# Altium PCB DVI.PcbDoc
Units mm, origin at the board's own origin, x right, y up, seen from the top; angles counter-clockwise.
Board outline 36.07 x 17.53 mm, 2 copper layers (Top Layer, Bottom Layer); 20 components, 35 nets, 130 pads, 36 vias.
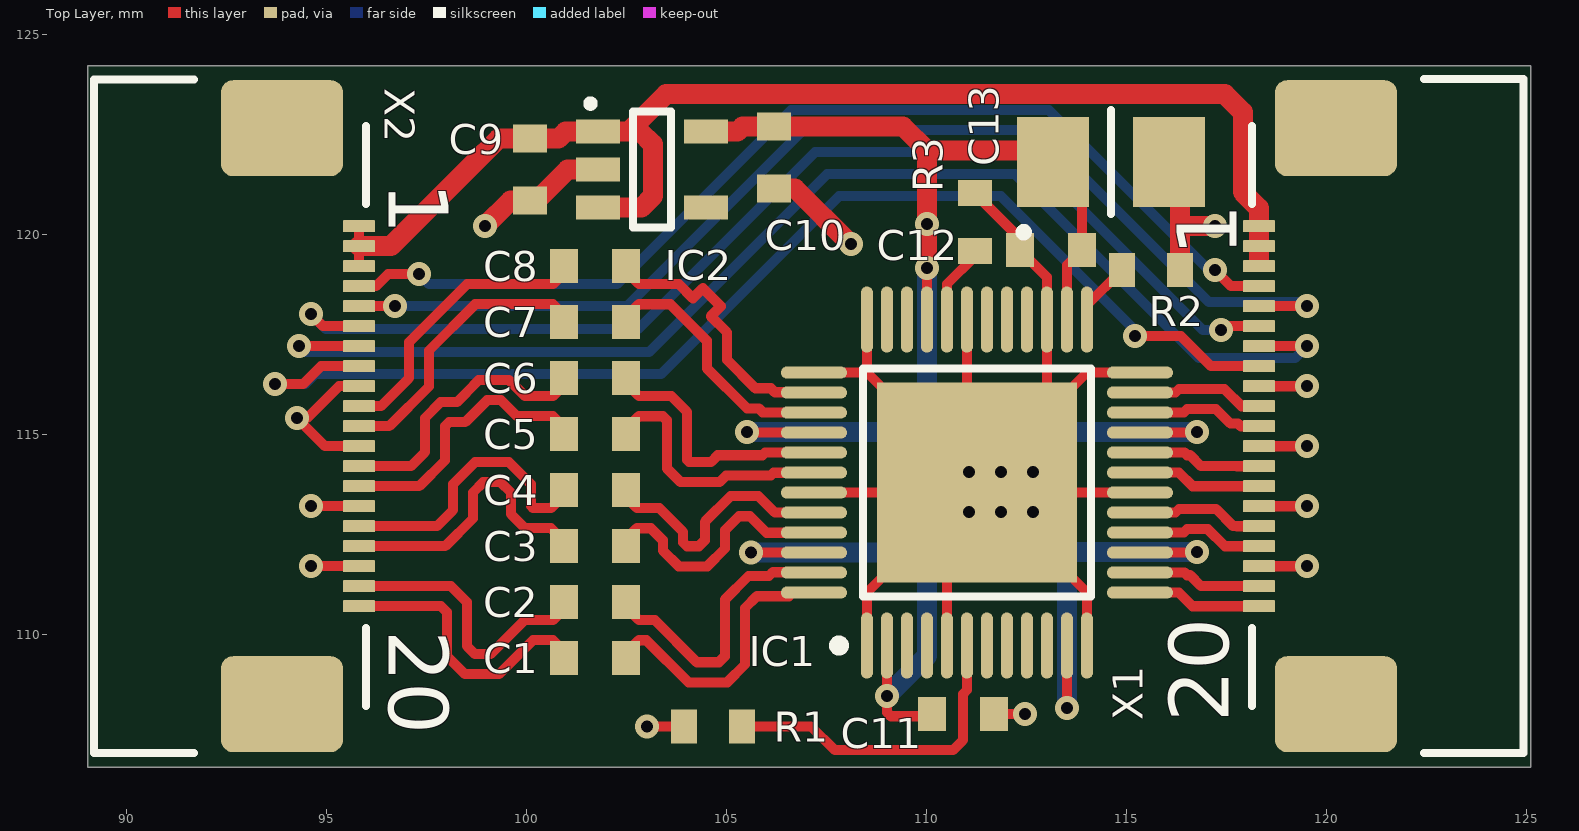
[diagram p0: Top Layer view]
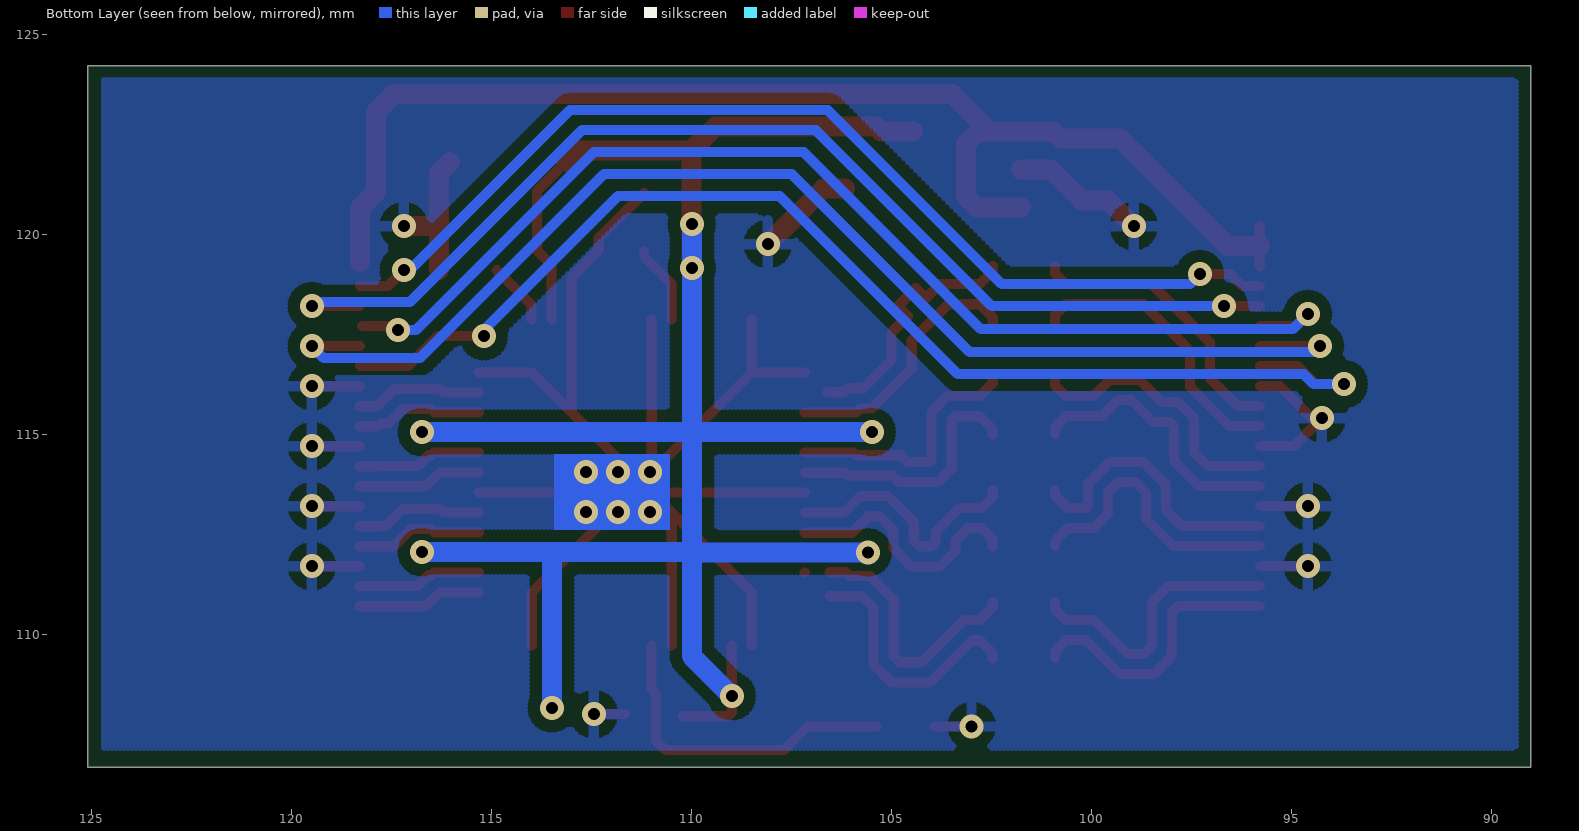
[diagram p1: Bottom Layer view, seen from below]

## Layer stack, top to bottom
Top Solder: solder mask 0.0102, Solder Resist, Dk 3.5
Top Layer: signal copper 0.0356
Dielectric1: dielectric 0.32, FR-4, Dk 4.8
Bottom Layer: signal copper 0.0356
Bottom Solder: solder mask 0.0102, Solder Resist, Dk 3.5

## Board outline
89.027,106.68 89.027,124.206 125.095,124.206 125.095,106.68

## Design rules (kind name [scope] priority, off if disabled: settings)
Clearance GND [InNet('GND') And OnLayer('Bottom Layer')] p1: gap=0.3
Clearance [All] p2: gap=0.15
DiffPairsRouting [All] p1: maxlimit=0.25 minlimit=0.15 mostfreqgap=0.25 toplayer_minwidth=0.381 toplayer_maxwidth=0.381 toplayer_prefwidth=0.381 bottomlayer_minwidth=0.381 bottomlayer_maxwidth=0.381 bottomlayer_prefwidth=0.381 maxuncoupledlength=12.7
FabricationTestPointUsage TestPointUsage [All] p1: valid=0 allowmultiple=FALSE
FabricationTestpoint Testpoint [All] p1: side=3 testpointundercomponent=TRUE minsize=1.016 maxsize=2.54 preferedsize=1.524 minholesize=0 maxholesize=1.016 preferedholesize=0.813 testpointgrid=0.025 allowsidetop=TRUE allowsidebottom=TRUE usegrid=TRUE gridtolerance=0
HoleSize [All] p1: absolutevalues=TRUE maxlimit=3 minlimit=0.3 maxpercent=80.000 minpercent=20.000
MinimumSolderMaskSliver [All] p1: minsoldermaskwidth=0
PolygonConnect [All] p1: connectstyle=Relief reliefconductorwidth=0.254 reliefentries=4 polygonreliefangle="90 Angle" airgapwidth=0.254
RoutingVias [All] p1: holewidth=0.711 width=1.27 viastyle="Through Hole" minholewidth=0.711 minwidth=1.27 maxholewidth=0.711 maxwidth=1.27
SilkToSolderMaskClearance SilkscreenOverComponentPads [IsPad] p1: minsilkscreentomaskgap=0 clearancetoexposedcopper=TRUE
SolderMaskExpansion [All] p1: expansion=0
Width [All] p1: maxlimit=0.5 minlimit=0.15 preferedwidth=0.25 minimp=50.000000 maximp=50.000000 favimp=50.000000
24 further rules are at their usual default settings.

## Classes and differential pairs
differential pair DDIC: +DDIC_P -DDIC_N
differential pair DDI2: +DDI2_P -DDI2_N
differential pair DDI1: +DDI1_P -DDI1_N
differential pair DDI0: +DDI0_P -DDI0_N
differential pair D2: +D2_P -D2_N
differential pair D2_OUT: +D2_OUT_P -D2_OUT_N
differential pair D1: +D1_P -D1_N
differential pair D1_OUT: +D1_OUT_P -D1_OUT_N
differential pair D0: +D0_P -D0_N
differential pair D0_OUT: +D0_OUT_P -D0_OUT_N
differential pair CLK: +CLK_P -CLK_N
differential pair CLK_OUT: +CLK_OUT_P -CLK_OUT_N

## Components (designator, comment, footprint, x,y, rotation, side; value= is the part's Value field where it differs from the comment)
C1 "100nF" T_CAPC0603X33N 101.7,109.4 r0 top locked
C2 "100nF" T_CAPC0603X33N 101.7,110.8 r0 top locked
C3 "100nF" T_CAPC0603X33N 101.7,112.2 r0 top locked
C4 "100nF" T_CAPC0603X33N 101.7,113.6 r0 top locked
C5 "100nF" T_CAPC0603X33N 101.7,115 r0 top locked
C6 "100nF" T_CAPC0603X33N 101.7,116.4 r0 top locked
C7 "100nF" T_CAPC0603X33N 101.7,117.8 r0 top locked
C8 "100nF" T_CAPC0603X33N 101.7,119.2 r0 top locked
C9 "1uF" T_CAPC0603X33N 100.076,121.62 r90 top locked
C10 "1uF" T_CAPC0603X33N 106.172,121.92 r90 top locked
C11 "100nF" T_CAPC0603X33N 110.9,108 r180 top locked
C12 "100nF" T_CAPC0603X33N 113.1,119.6 r0 top
C13 "22uF" CAPMP3528X210N 114.6,121.8 r0 top
IC1 "IC-NXP-PTN3360B" TSQFP50P900X900X160-48N_TP 111.252,113.792 r90 top locked
IC2 "NCP511SN33T1G" SOT95P279X142-5N 103.124,121.62 r0 top locked
R1 "10K" T_RESC0603X30N 104.648,107.696 r180 top locked
R2 "0R" T_RESC0603X30N 115.6,119.1 r180 top
R3 "0R" T_RESC0603X30N 111.2,120.3 r270 top locked
X1 "52745-2097" T_MOLEX_52745-2097_MIRROR 118.3,110.7 r90 top locked
X2 "52745-2097" T_MOLEX_52745-2097 95.8,120.2 r270 top locked

## Footprints (in the part's own frame and the unit in brackets; to place one, negate y for a bottom-side part, rotate by r counter-clockwise, add the part's x,y. Pads: shape width x height; smd on the part's side, far side on the other; paste and mask are expansions set on the pad)
CAPMP3528X210N [mm]
  rect 1.8x2.25 smd: 1(-1.45,0) 2(1.45,0)
  silkscreen extent -2.26,-1.83 0,1.3, body extent -1.85,-1.5 1.85,1.5, height 1.9
SOT95P279X142-5N [mm]
  rect 1.1x0.6 smd: 1(-1.35,0.95) 2(-1.35,0) 3(-1.35,-0.95) 4(1.35,-0.95) 5(1.35,0.95)
  silkscreen extent -1.61,-1.45 0.48,1.73, body extent -0.9,-1.52 0.9,1.52, height 1.1
T_CAPC0603X33N [mm]
  rect 0.7x0.85 smd: 1(-0.775,0) 2(0.775,0)
  body extent -0.8,-0.4 0.8,0.4, height 0.9
T_MOLEX_52745-2097 [mm] "DVI FFC Connector 0.5mm pitch"
  rrect12% 0.3x0.8 smd: 1(0,0) 2(0.5,0) 3(1,0) 4(1.5,0) 5(2,0) 6(2.5,0) 7(3,0) 8(3.5,0) 9(4,0) 10(4.5,0) 11(5,0) 12(5.5,0) 13(6,0) 14(6.5,0) 15(7,0) 16(7.5,0) 17(8,0) 18(8.5,0) 19(9,0) 20(9.5,0)
  rrect25% 2.4x3.05 smd: ""(-2.45,-1.925) ""(11.95,-1.925)
  silkscreen extent -3.67,-6.62 13.18,0.17, body extent -3.3,-6.05 12.8,0.35, height 2
T_MOLEX_52745-2097_MIRROR [mm] "DVI FFC Connector 0.5mm pitch"
  rrect12% 0.3x0.8 smd: 1(9.5,0) 2(9,0) 3(8.5,0) 4(8,0) 5(7.5,0) 6(7,0) 7(6.5,0) 8(6,0) 9(5.5,0) 10(5,0) 11(4.5,0) 12(4,0) 13(3.5,0) 14(3,0) 15(2.5,0) 16(2,0) 17(1.5,0) 18(1,0) 19(0.5,0) 20(0,0)
  rrect25% 2.4x3.05 smd: ""(-2.45,-1.925) ""(11.95,-1.925)
  silkscreen extent -3.67,-6.62 13.18,0.17, body extent -3.3,-6.05 12.8,0.35, height 2
T_RESC0603X30N [mm]
  rect 0.65x0.85 smd: 1(-0.725,0) 2(0.725,0)
  body extent -0.8,-0.4 0.8,0.4, height 0.5
TSQFP50P900X900X160-48N_TP [mm]
  oval 1.65x0.3 smd: 1(-4.075,2.75) 2(-4.075,2.25) 3(-4.075,1.75) 4(-4.075,1.25) 5(-4.075,0.75) 6(-4.075,0.25) 7(-4.075,-0.25) 8(-4.075,-0.75) 9(-4.075,-1.25) 10(-4.075,-1.75) 11(-4.075,-2.25) 12(-4.075,-2.75) 25(4.075,-2.75) 26(4.075,-2.25) 27(4.075,-1.75) 28(4.075,-1.25) 29(4.075,-0.75) 30(4.075,-0.25) 31(4.075,0.25) 32(4.075,0.75) 33(4.075,1.25) 34(4.075,1.75) 35(4.075,2.25) 36(4.075,2.75)
  oval 0.3x1.65 smd: 13(-2.75,-4.075) 14(-2.25,-4.075) 15(-1.75,-4.075) 16(-1.25,-4.075) 17(-0.75,-4.075) 18(-0.25,-4.075) 19(0.25,-4.075) 20(0.75,-4.075) 21(1.25,-4.075) 22(1.75,-4.075) 23(2.25,-4.075) 24(2.75,-4.075) 37(2.75,4.075) 38(2.25,4.075) 39(1.75,4.075) 40(1.25,4.075) 41(0.75,4.075) 42(0.25,4.075) 43(-0.25,4.075) 44(-0.75,4.075) 45(-1.25,4.075) 46(-1.75,4.075) 47(-2.25,4.075) 48(-2.75,4.075)
  rect 5x5 smd: 49(0,0)
  silkscreen extent -4.2,-2.85 2.85,3.57, body extent -3.5,-3.5 3.5,3.5, height 1.6

## Part data
C1 C2 C3 C4 C5 C6 C7 C8 C11 C12: library part C-X7R-100nF-16V-10%-0402, "Capacitor Ceramic X7R 100nF 16V 10% 0402"
C9 C10: library part C-X5R-1uF-16V-20%-0603, "Capacitor Ceramic X5R 1uF 16V 20% 0603"
C13: library part C-TA-22uF-10V-20%-3528, "Capacitor TA 22uF 10V 20% 3528"
IC2: library part IC-ON-NCP511SN33T1G, "NCP511SN33T1G LDO Regulator"
R1: library part R-10KR-63mW-1%-0603, "Resistor 10 Kohm 63mW 1% 0603"
R2 R3: library part R-0R-63mW-1%-0603, "Resistor 0 ohm 63mW 1% 0603"
X1 X2: library part CON-Molex-52745-2097-20-0.5mm, "0.50mm Pitch FFC/FPC DVI Connector"

## Via types
v1: diameter 0.6, hole 0.3, Top Layer to Bottom Layer, 36 vias

## Nets (pads, with @x,y where several pads share a name; then routed paths per layer and width w, separated by ;. In a path a pad name is that pad's centre, name@x,y a point inside that pad or via, vN(x,y) a via of type N, cw(c..) or ccw(c..) an arc to the next point about the centre after c; other vN are vias at no path point)
3V3: C10.2 C11.2 C12.2 C13.1 IC1.2 IC1.11 IC1.15 IC1.21 IC1.26 IC1.33 IC1.40 IC1.46 IC2.5 | length 66.3
  Top Layer w0.25: v1(110,120.25) v1@110.002,120.25 ; C13.1 113.875,121.075 C12.2 113.502,119.227 IC1.26
  Top Layer w0.254: v1(105.6,112.042) IC1.46 ; v1@105.65,115.042 IC1.40 ; IC1.2 109.002,108.048 109.1,107.95 C11.2@110.223,107.95 ; IC1.33 v1@110.002,119.148 ; v1@113.502,108.152 IC1.11 ; IC1.15 v1@116.742,112.042 ; IC1.21 v1@116.742,115.042
  Top Layer w0.5: IC2.5 105.27,122.57 105.395,122.695 C10.2 109.405,122.695 110.002,122.098 ; v1@110.002,119.15 110.002,120.25 110.002,122.098 ; C13.1 112.852,122.098 110.002,122.098
  Bottom Layer w0.5: v1(105.6,112.042) 109.942,112.042 ; v1@105.65,115.05 109.95,115.05 110,115.1 ; v1(109,108.45) 110,109.45 110,115.1 ; v1(110,120.25) v1(110,119.15) 110,115.1 ; 110.05,112.05 v1(116.75,112.05) ; 110.05,115.05 v1(116.75,115.05) ; v1(113.5,108.15) 113.5,112
  other v1: 105.5,115.05
5V: C9.2 IC2.1 IC2.3 X1.1 X1.2 X1.3 X2.1 X2.2 X2.3 | length 32.3
  Top Layer w0.254: X2.3 X2.2 X2.1
  Top Layer w0.5: X2.2 96.6,119.7 98.65,121.75 99.295,122.395 C9.2 100.795,122.395 100.97,122.57 IC2.1 102.55,122.57 ; IC2.3 102.87,120.67 103.15,120.95 103.15,122.25 102.83,122.57 102.55,122.57 ; X1.3@118.3,119.3 X1.2 X1.1 118.3,120.65 117.9,121.05 117.9,123.05 117.45,123.5 103.48,123.5 102.55,122.57
CEC: X1.7 X2.7 | length 31.8
  Top Layer w0.25: v1(94.3,117.2) X2.7 ; X1.7 v1(119.5,117.2)
  Bottom Layer w0.25: v1(94.3,117.2) 94.45,117.05 103.05,117.05 107.5,121.5 112.2,121.5 116.8,116.9 119.2,116.9 v1(119.5,117.2)
CLK_N: C8.2 IC1.38 | length 6.6
  Top Layer w0.254: C8.2 102.475,119.079 102.8,118.754 ; 102.85,118.754 103.796,118.754 104.15,118.4 104.4,118.65 104.85,118.2 104.6,117.95 105.004,117.546 105.004,116.859 105.713,116.15 106.1,116.15 106.2,116.05 IC1.38@106.6,116.05
CLK_OUT_N: IC1.23 X1.10 | length 3.2
  Top Layer w0.254: IC1.23 115.327,116.046 116.217,116.046 116.302,116.131 117.438,116.131 117.869,115.7 X1.10
CLK_OUT_P: IC1.22 X1.11 | length 3.2
  Top Layer w0.254: IC1.22 116.426,115.542 116.511,115.627 117.229,115.627 117.587,115.269 117.781,115.269 117.85,115.2 X1.11
CLK_P: C7.2 IC1.39 | length 6.4
  Top Layer w0.254: C7.2 102.475,117.925 102.8,118.25 ; 102.85,118.25 103.587,118.25 104.5,117.337 104.5,116.65 105.504,115.646 105.796,115.646 105.896,115.546 107.173,115.546 IC1.39
D0_N: C6.2 IC1.41 | length 6.4
  Top Layer w0.254: C6.2 102.475,116.279 102.8,115.954 103.609,115.954 104.004,115.559 104.004,114.359 104.056,114.306 104.606,114.306 104.773,114.473 104.809,114.473 105.227,114.473 105.889,114.473 105.958,114.542 IC1.41
D0_OUT_N: IC1.20 X1.13 | length 3.1
  Top Layer w0.254: IC1.20 115.327,114.546 116.438,114.546 116.511,114.473 116.582,114.473 116.853,114.202 117.752,114.202 117.75,114.2 X1.13
D0_OUT_P: IC1.19 X1.14 | length 3.1
  Top Layer w0.254: IC1.19 116.3,114.042 116.644,113.698 117.752,113.698 117.75,113.7 X1.14
D0_P: C5.2 IC1.42 | length 6.4
  Top Layer w0.254: C5.2 102.475,115.125 102.8,115.45 103.4,115.45 103.5,115.35 103.5,114.15 103.848,113.802 104.815,113.802 104.982,113.969 105.018,113.969 106.098,113.969 106.167,114.038 107.177,114.038 IC1.42
D1_N: C4.2 IC1.44 | length 6.5
  Top Layer w0.254: C4.2 102.475,113.429 102.75,113.154 103.309,113.154 103.904,112.559 103.904,112.3 104.004,112.2 104.3,112.2 104.45,112.35 104.45,112.809 105.095,113.454 105.788,113.454 106.2,113.042 IC1.44
D1_OUT_N: IC1.17 X1.16 | length 3.2
  Top Layer w0.254: IC1.17 115.327,113.046 116.217,113.046 116.302,113.131 117.232,113.131 117.661,112.702 117.752,112.702 117.75,112.7 X1.16
D1_OUT_P: IC1.16 X1.17 | length 3.2
  Top Layer w0.254: IC1.16 116.426,112.542 116.511,112.627 117.023,112.627 117.452,112.198 117.752,112.198 117.75,112.2 X1.17
D1_P: C3.2 IC1.45 | length 6.5
  Top Layer w0.254: C3.2 102.475,112.375 102.75,112.65 103.1,112.65 103.4,112.35 103.4,112.091 103.795,111.696 104.509,111.696 104.954,112.141 104.954,112.6 105.304,112.95 105.579,112.95 105.991,112.538 107.177,112.538 IC1.45
D2_N: C2.2 IC1.47 | length 6.5
  Top Layer w0.254: C2.2 102.475,110.679 102.8,110.354 103.196,110.354 104.25,109.3 104.8,109.3 104.95,109.45 104.95,110.863 105.541,111.454 106.054,111.454 106.15,111.55 IC1.47@106.55,111.55 ; IC1.47 IC1.47@107.177,111.546
D2_OUT_N: IC1.14 X1.19 | length 3.1
  Top Layer w0.254: IC1.14 115.327,111.546 116.438,111.546 116.511,111.473 116.582,111.473 116.851,111.204 118.296,111.204 X1.19
D2_OUT_P: IC1.13 X1.20 | length 3.1
  Top Layer w0.254: IC1.13 116.3,111.042 116.642,110.7 X1.20
D2_P: C1.2 IC1.48 | length 6.5
  Top Layer w0.254: C1.2 102.475,109.525 102.8,109.85 102.987,109.85 104.041,108.796 105.009,108.796 105.454,109.241 105.454,110.654 105.75,110.95 IC1.48@106.55,110.95
DDI0_N: C6.1 X2.13 | length 7
  Top Layer w0.25: X2.13 97.1,114.2 97.45,114.55 97.45,115.407 97.843,115.8 98.25,115.8 98.5,116.05 98.5,116.057 98.793,116.35 99.557,116.35 99.957,115.95 100.65,115.95 100.925,116.225 C6.1
DDI0_P: C5.1 X2.14 | length 7
  Top Layer w0.25: X2.14 97.307,113.7 97.95,114.343 97.95,115.2 98.05,115.3 98.457,115.3 99.007,115.85 99.35,115.85 99.75,115.45 100.65,115.45 100.925,115.175 C5.1
DDI1_N: C4.1 X2.16 | length 7.2
  Top Layer w0.25: X2.16 97.75,112.7 98.15,113.1 98.15,113.75 98.7,114.3 99.55,114.3 100.1,113.75 100.1,113.207 100.157,113.15 100.55,113.15 ; 100.6,113.15 100.925,113.475 C4.1
DDI1_P: C3.1 X2.17 | length 7.2
  Top Layer w0.25: X2.17 97.957,112.2 98.65,112.893 98.65,113.543 98.907,113.8 99.343,113.8 99.6,113.543 99.6,113 99.95,112.65 100.55,112.65 ; 100.6,112.65 100.925,112.325 C3.1
DDI2_N: C2.1 X2.19 | length 7.1
  Top Layer w0.25: X2.19 98.1,111.2 98.5,110.8 98.5,109.7 98.7,109.5 99.093,109.5 99.943,110.35 100.65,110.35 100.925,110.625 C2.1
DDI2_P: C1.1 X2.20 | length 7.1
  Top Layer w0.25: X2.20 97.85,110.7 98,110.55 98,109.45 98.45,109 99.3,109 100.15,109.85 100.65,109.85 100.925,109.575 C1.1
DDIC_N: C8.1 X2.10 | length 7.2
  Top Layer w0.25: X2.10 96.35,115.7 97.05,116.4 97.05,117.3 98.5,118.75 100.65,118.75 100.925,119.025 C8.1
DDIC_P: C7.1 X2.11 | length 7.2
  Top Layer w0.25: X2.11 96.35,115.2 96.557,115.2 97.55,116.193 97.55,117.093 98.707,118.25 100.65,118.25 100.925,117.975 C7.1
DDR_SCL: X1.6 X2.6 | length 28.9
  Top Layer w0.25: v1(94.6,118) 94.9,117.7 X2.6 ; v1@117.3,117.7 X1.6@118.25,117.7
  Bottom Layer w0.25: v1(94.6,118) 94.975,117.625 102.775,117.625 107.2,122.05 112.45,122.05 116.9,117.6 117.25,117.6 v1@117.3,117.7
  other v1: 117.35,117.6
DDR_SDA: X1.5 X2.5 | length 28.5
  Top Layer w0.25: X2.5 v1(96.7,118.2) ; X1.5 v1(119.5,118.2)
  Bottom Layer w0.25: v1(96.7,118.2) 102.5,118.2 106.9,122.6 112.75,122.6 117.05,118.3 119.4,118.3 v1(119.5,118.2)
GND: C9.1 C10.1 C11.1 C12.1 C13.2 IC1.1 IC1.5 IC1.12 IC1.18 IC1.24 IC1.27 IC1.31 IC1.36 IC1.37 IC1.43 IC1.49 IC2.2 R1.2 R2.1 R3.1 X1.9 X1.12 X1.15 X1.18 X2.9 X2.12 X2.15 X2.18 | length 65.4
  Top Layer w0.25: v1(94.6,111.7) X2.18 ; v1(94.6,113.2) X2.15 ; X2.12 94.95,114.7 v1(94.25,115.4) 94.5,115.4 95.3,116.2 X2.9 ; v1(103.004,107.696) R1.2 ; C11.1 v1(112.45,108)
  Top Layer w0.254: IC1.43 IC1.49@111.002,113.542 ; IC1.37 108.502,116.542 ; IC1.1 108.502,111.042 IC1.49@111.002,113.542 ; IC1.36 108.502,116.542 ; IC1.5 IC1.49@110.502,113.042 ; IC1.31 IC1.49@111.002,114.042 ; R3.1 112.325,119.9 C12.1 113.002,118.923 IC1.27 IC1.49@113.002,115.542 ; IC1.49@111.502,113.542 IC1.18 ; IC1.12 114.002,111.042 IC1.49 ; IC1.24 114.002,116.542 IC1.49 ; X1.18 v1(119.5,111.7) ; X1.15 v1(119.5,113.2) ; X1.12 v1(119.5,114.7) ; X1.9 v1(119.5,116.2) ; 108.502,116.542 IC1.49@111.002,114.042 ; IC1.49@111.002,113.542 IC1.49 ; IC1.49@111.002,114.042 IC1.49
  Top Layer w0.5: v1(98.95,120.2) 99.595,120.845 C9.1 100.245,120.845 101.02,121.62 IC2.2 ; C10.1 106.705,121.145 v1(108.1,119.75) ; C13.2 116.325,121.525 116.325,120.2 ; R2.1 116.325,120.2 ; v1(117.2,120.2) 116.325,120.2
  other v1: 111.05,113.05 111.85,113.05 112.65,113.05 111.05,114.05 111.85,114.05 112.65,114.05
HEC: X1.8 X2.8 | length 30.7
  Top Layer w0.25: v1(93.7,116.25) 94.4,116.25 94.85,116.7 X2.8 ; v1(115.2,117.45) 116.35,117.45 117.1,116.7 X1.8
  Bottom Layer w0.25: v1(93.7,116.25) 94.45,116.25 94.7,116.5 103.35,116.5 107.8,120.95 111.85,120.95 115.2,117.6 v1(115.2,117.45)
HECDP: X1.4 X2.4 | length 26.4
  Top Layer w0.25: X2.4 96.228,118.7 96.528,119 v1(97.3,119) ; v1(117.2,119.1) 117.6,118.7 X1.4
  Bottom Layer w0.25: v1(97.3,119) 97.55,118.75 102.25,118.75 106.6,123.1 113.05,123.1 117.05,119.1 v1(117.2,119.1)
NetIC1_6: IC1.6 R1.1 | length 8.3
  Top Layer w0.25: R1.1 107.104,107.696 107.7,107.1 110.65,107.1 110.9,107.35 110.9,108.5 111.002,108.602 IC1.6
NetIC1_25: IC1.25 R2.2 | length 1.6
  Top Layer w0.25: IC1.25 114.002,118.227 R2.2
NetIC1_32: IC1.32 R3.2 | length 2
  Top Layer w0.25: IC1.32 110.502,118.752 111.2,119.45 R3.2
pads on no net: IC1.3 IC1.4 IC1.7 IC1.8 IC1.9 IC1.10 IC1.28 IC1.29 IC1.30 IC1.34 IC1.35 IC2.4 X1. X2.

## Polygon pours and split planes (outlines as drawn)
GND on Bottom Layer "Top Layer-No Net" (hatched 90Degree grid 0.1 track 0.15, remove dead copper, pour order 1000): 89.4,123.85 124.7,123.85 124.7,107.15 89.4,107.15 89.4,123.85

## Other copper
Bottom Layer:
  rectangle net GND: 110.55,112.6 113.45,114.5

## Silkscreen, mask and mechanical layers (free items; w line width, h text height)
Mechanical 3:
  the board outline again, w0.3
Mechanical 13:
  the board outline again, w0.2

## Text inside footprints (layer, text, board x,y; h text height)
X1: Top Overlay "20" at 117.55,107.8 h1.5 r90; Top Overlay "1" at 117.75,119.45 h1.5 r90
X2: Top Overlay "20" at 96.549,110.1 h1.5 r270; Top Overlay "1" at 96.549,121.3 h1.5 r270